# Altium PCB PCB.PcbDoc
Units mm, origin at the board's own origin, x right, y up, seen from the top; angles counter-clockwise.
Board outline 87.17 x 48.5 mm, 2 copper layers (Top Layer, Bottom Layer), stack 0.781 mm thick; 42 components, 27 nets, 111 pads, 5 vias.
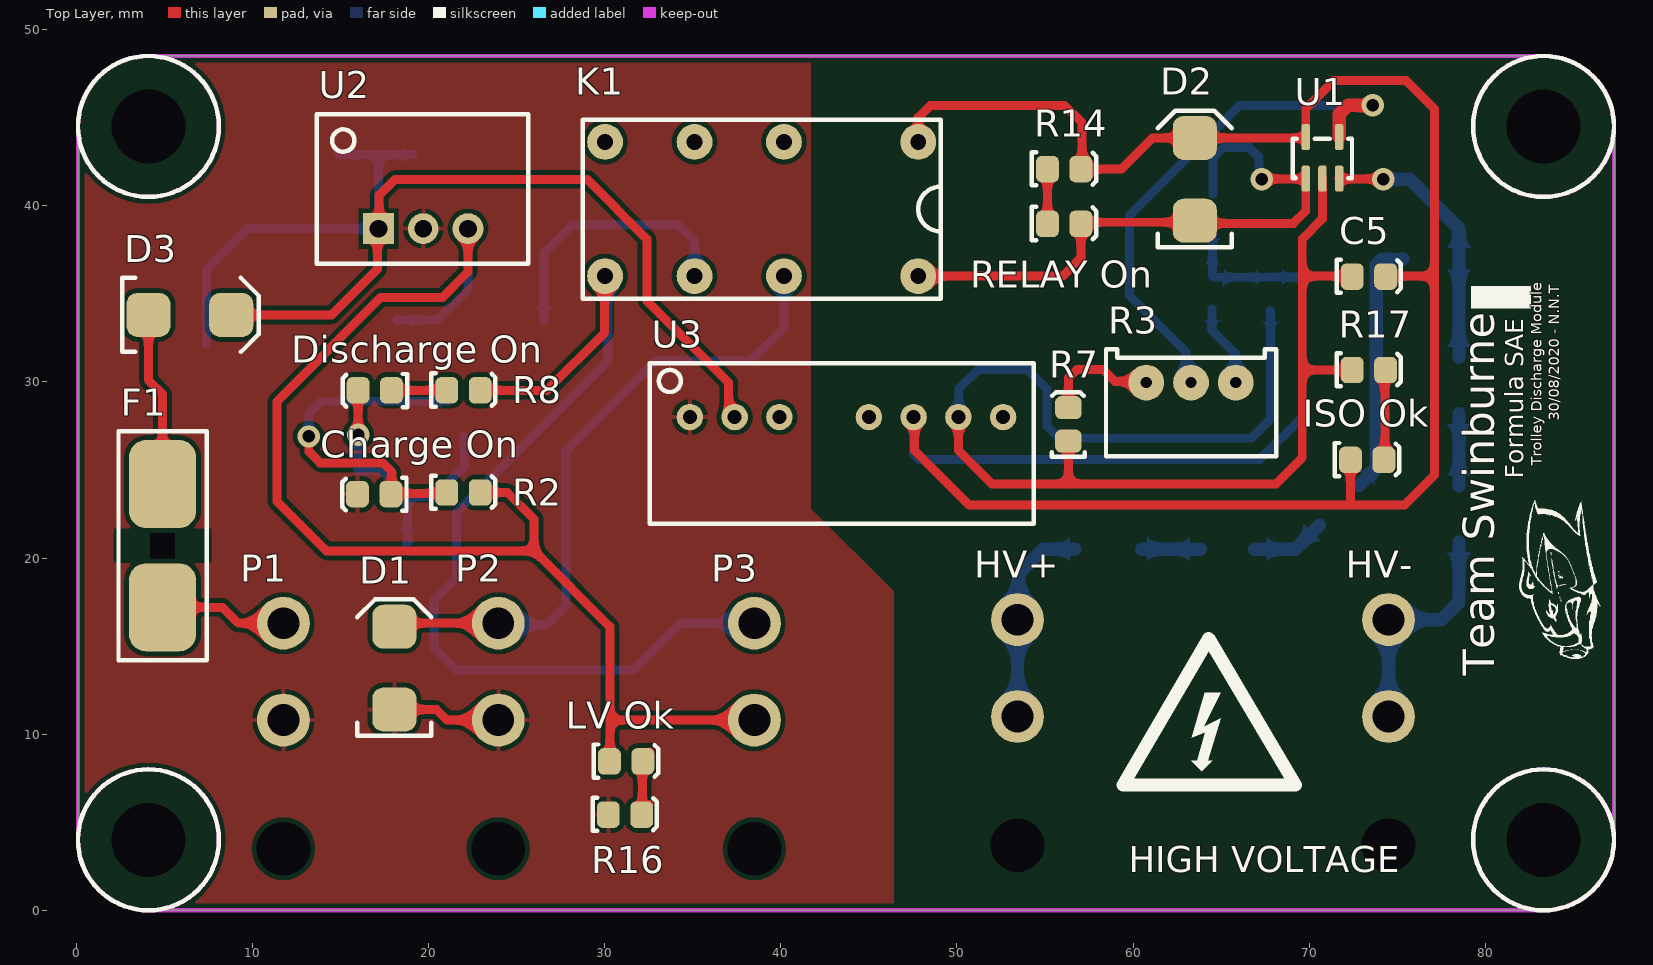
[diagram p0: Top Layer view]
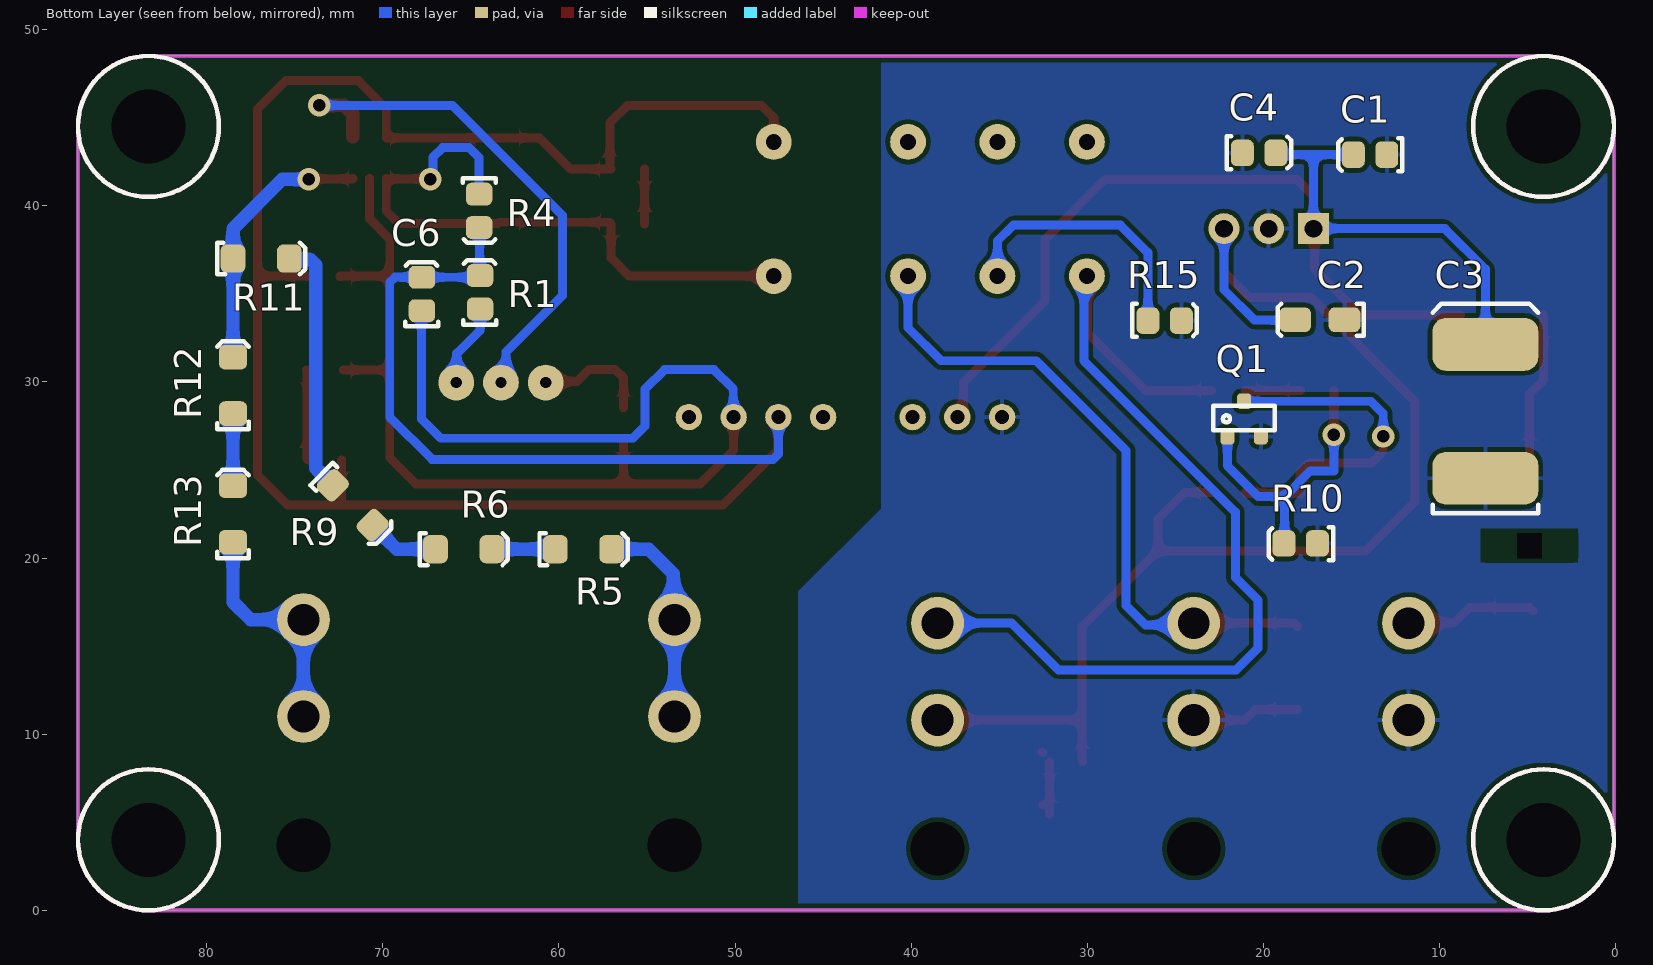
[diagram p1: Bottom Layer view, seen from below]
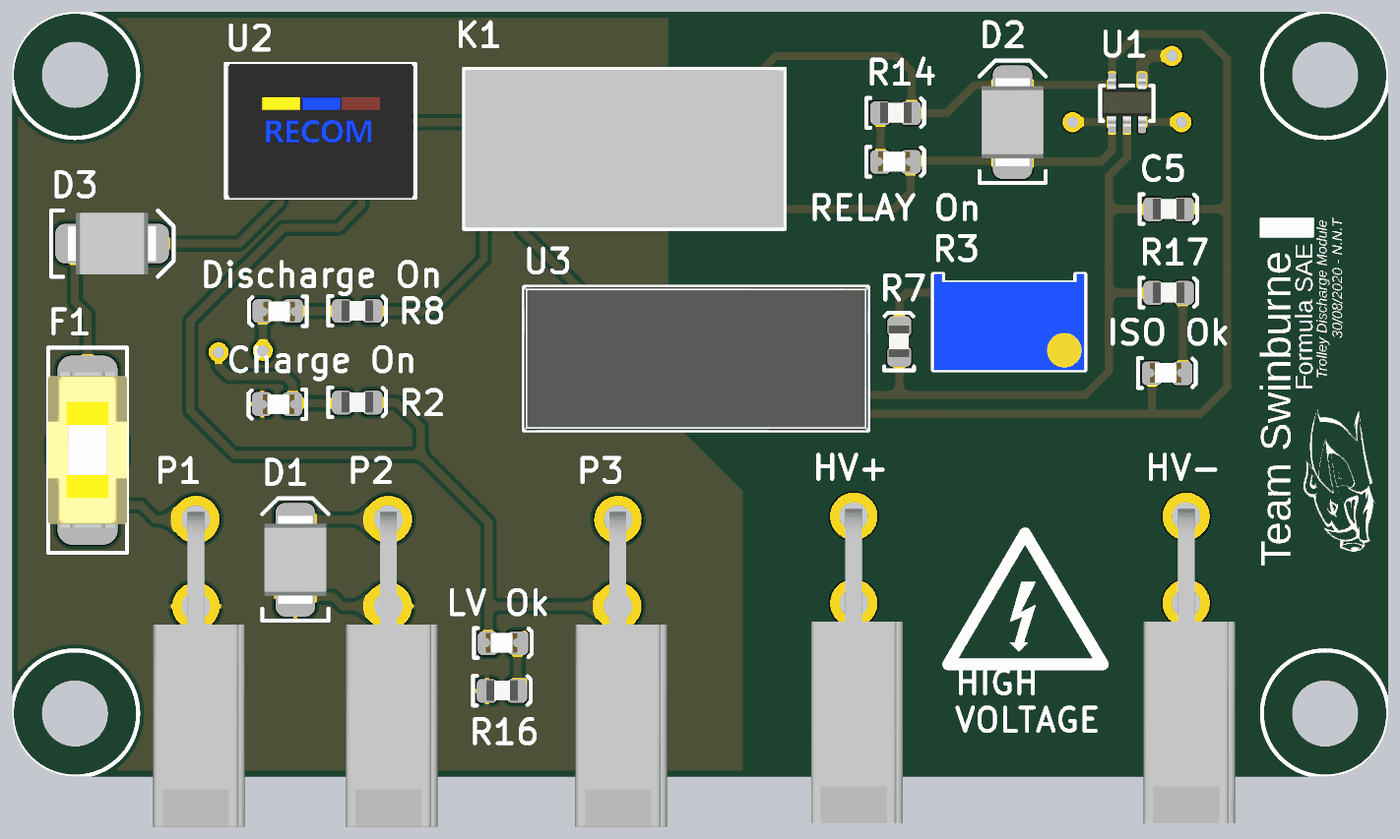
[diagram p2: 3D render of the assembled board from above, using the file's embedded part models]
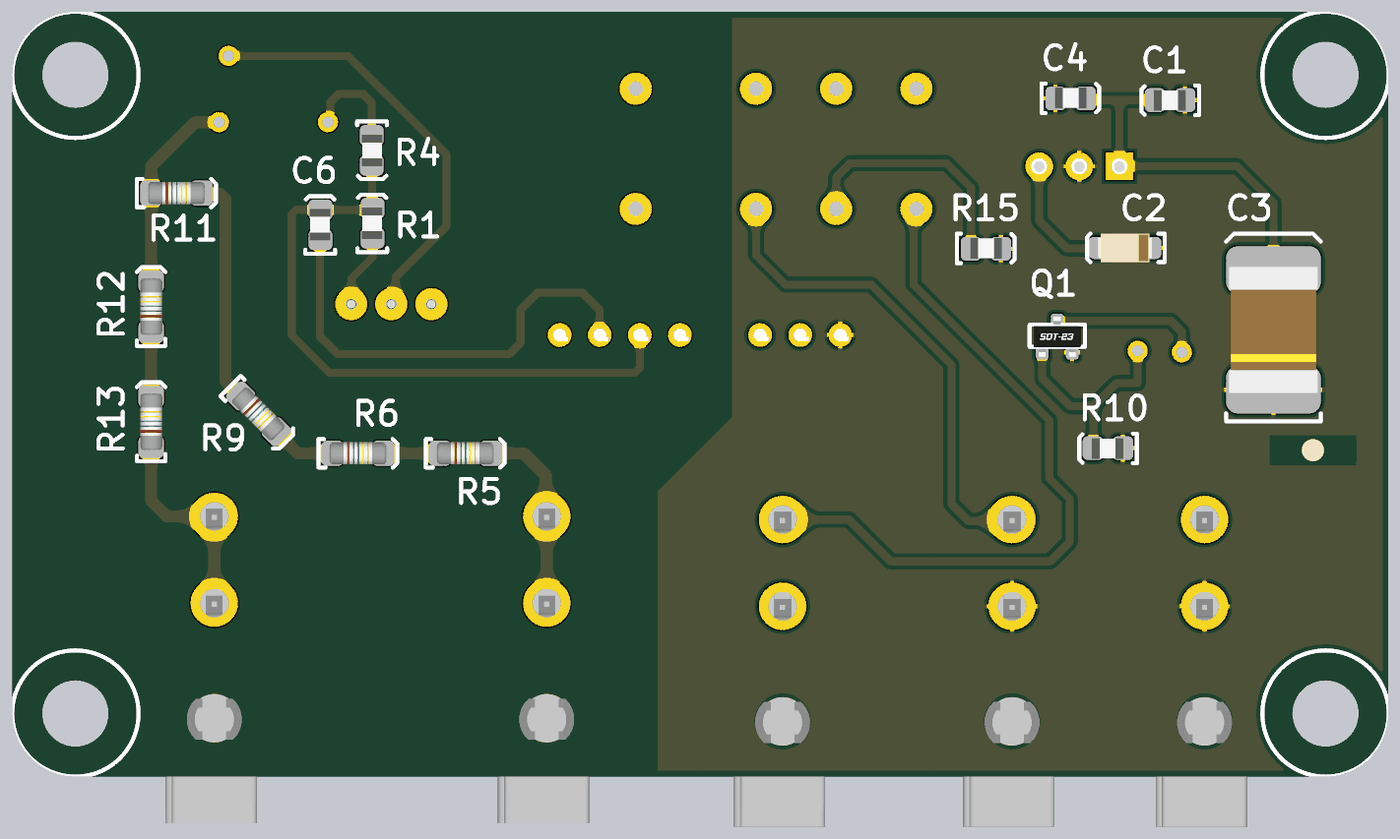
[diagram p3: 3D render of the assembled board from below, using the file's embedded part models]

## Layer stack, top to bottom
Top Solder: solder mask 0.0254, SM-001, Dk 4
Top Layer: signal copper 0.035
Dielectric x: core 0.7112, Core-039, Dk 4.8
Bottom Layer: signal copper 0.035
Bottom Solder: solder mask 0.0254, SM-001, Dk 4

## Board outline
4.1,0 83.3,0 ccw(c83.3,4) 87.3,4 87.3,44.5 ccw(c83.3,44.5) 83.3,48.5 4.1,48.5 ccw(c4.1,44.527) 0.127,44.527 0.127,3.973 ccw(c4.1,3.973)

## Design rules (kind name [scope] priority, off if disabled: settings)
Clearance [InNet('HV+')] p1: gap=3 ignorepadtopadclearanceinfootprint=FALSE except(1: Arc-SMDPad Track-SMDPad SMDPad-SMDPad)
Clearance Clearance_1 [All] p2: gap=0.254 ignorepadtopadclearanceinfootprint=FALSE
PolygonConnect [All] p1: connectstyle=Relief reliefconductorwidth=0.254 reliefentries=4 polygonreliefangle="90 Angle" airgapwidth=0.254
RoutingVias [All] p1: holewidth=0.711 width=1.27 viastyle="Through Hole" minholewidth=0.711 minwidth=1.27 maxholewidth=0.711 maxwidth=1.27
SolderMaskExpansion [All] p1: expansion=0.102 istentingtop=FALSE
Width [All] p1: maxlimit=1.16 minlimit=0.254 preferedwidth=0.508 minimp=50.000000 maximp=50.000000 favimp=50.000000
30 further rules are at their usual default settings.

## Classes and differential pairs
component class U_Switch: "Charge On" D2 "Discharge On" K1 P3 Q1 R1 R2 R3 R4 R6 R7 R8 R10 R11 R12 R13 R14 R15 "RELAY On" U1
component class U_Power: C1 C2 C3 C4 C5 C6 D3 F1 "ISO Ok" "LV Ok" R16 R17 U2 U3
component class "Top Level": D1 HV+ HV- P1 P2

## Components (designator, comment, footprint, x,y, rotation, side; value= is the part's Value field where it differs from the comment)
C1 "10uF" 0805 13.962,42.874 r0 bottom
C2 "22uF" 1206 18,33.525 r0 bottom
C3 "47uF" 2924 7.4,28.279 r90 bottom
C4 "100nF" 0805 20.238,43.026 r180 bottom
C5 "330nF" 0805 73.4,36 r0 top
C6 "10uF" 0805 67.8,35 r90 bottom
"Charge On" "Red" "0805 LED" 16.9,23.6 r180 top
D1 "SD560BTR" "SMB Diode" 18.062,11.65 r90 top
D2 "SD560BTR" "SMB Diode" 63.5,39.4 r90 top
D3 "SD560BTR" "SMB Diode" 4.35,33.8 r0 top
"Discharge On" "Red" "0805 LED" 16.935,29.496 r180 top
F1 "0154.750DR" "Omni BLOK 0154" 4.9,20.7 r270 top
HV+ "39300020" 39300020 53.438,11 r0 top
HV- "39300020" 39300020 74.5,11 r0 top
"ISO Ok" "Green" "0805 LED" 73.3,25.6 r0 top
K1 "V23105A5303A201" "TI 2-DIL" 38.91,39.81 r180 top
"LV Ok" "Green" "0805 LED" 31.228,8.484 r0 top (schematic designator D7)
P1 "39300020" 39300020 11.762,10.8 r0 top
P2 "39300020" 39300020 23.962,10.8 r0 top
P3 "39300020" 39300020 38.5,10.8 r0 top
Q1 "BC817-16LT1" "ON SOT-23 BJT" 21.1,27.9 r180 bottom
R1 "10k" 0805 64.5,35.1 r90 bottom
R2 "680R" 0805 21.997,23.746 r0 top
R3 "10K (Var)" "B 3296" 63.2,29.4 r180 top
R4 "4.7k" 0805 64.5,39.7 r270 bottom
R5 "330K" "VB 0204" 58.6,20.5 r180 bottom
R6 "330K" "VB 0204" 65.4,20.5 r180 bottom
R7 "6.8k" 0805 56.3,27.6 r90 top
R8 "680R" 0805 21.997,29.548 r0 top
R9 "330K" "VB 0204" 71.7,23 r225 bottom
R10 "10k" 0805 17.9,20.8 r0 bottom
R11 "330K" "VB 0204" 76.9,37 r180 bottom
R12 "10K" "VB 0204" 78.5,29.8 r90 bottom
R13 "10K" "VB 0204" 78.5,22.5 r90 bottom
R14 "1k" 0805 56.1,42.1 r0 top
R15 "4.7k" 0805 25.6,33.5 r180 bottom
R16 "1k" 0805 31.166,5.457 r0 top
R17 "1k" 0805 73.4,30.7 r0 top
"RELAY On" "Red" "0805 LED" 56.1,39 r0 top
U1 "TS391ILT" "ON SOT-23-5" 69.175,40.563 r0 top
U2 "R-78C12-1.0" "RECOM 3-SIP" 17.161,38.7 r0 top
U3 "TMR 3-1212WI" "TRECO 8-SIP" 32.55,21.95 r0 top

## Footprints (in the part's own frame and the unit in brackets; to place one, negate y for a bottom-side part, rotate by r counter-clockwise, add the part's x,y. Pads: shape width x height; smd on the part's side, far side on the other; paste and mask are expansions set on the pad)
0805 [mm]
  rrect50% 1.3x1.5 smd: 1(-0.962,-0.026) 2(0.938,-0.026)
  silkscreen extent -1.85,-0.95 1.8,0.93, body extent -1,-0.65 1,0.66, height 0.73
"0805 LED" [mm]
  rrect50% 1.3x1.5 smd: A(-0.962,-0.026) K(0.938,-0.026)
  silkscreen extent -1.85,-0.95 1.8,0.93, body extent -1.1,-0.62 0.9,0.63, height 1
1206 [mm]
  rrect50% 1.8x1.4 smd: 1(-2.6,0) 2(0.2,0)
  silkscreen extent -3.7,-0.9 1.2,0.9, body extent -2.9,-0.9 0.5,0.9, height 1.85
2924 [mm]
  rrect50% 3x6 smd: 1(-3.75,0) 2(3.85,0)
  silkscreen extent -5.75,-3 6.15,3, body extent -3.94,-2.81 4.04,2.81, height 1.14
39300020 [mm]
  round 3 hole 1.8: 1(0,0) 2(0,5.5)
  round 1.524 hole 3.05: ""(0,-7.3)
  body extent -2.7,-13.97 3.1,5.97, height 11.4
"B 3296" [mil]
  round 80 hole 25.2: 1(-103.39,-22) 2(-3.39,-22) 3(96.61,-22)
  silkscreen extent -193,-97 187,143, body extent -191,-97 184,143, height 455
"Omni BLOK 0154" [mm]
  rrect50% 5x3.81 smd: 1(3.5,0) 2(-3.5,0)
  rect 0x0 hole 1.4 square unplated: 3(0,0)
  silkscreen extent -6.5,-2.5 6.5,2.5, body extent -4.93,-2.52 4.9,2.51, height 3.81
"ON SOT-23 BJT" [mm] "NUP2105L"
  rrect50% 0.8x0.9 smd: B(-0.95,-1) C(0,1) E(0.95,-1)
  silkscreen extent -1.75,-0.65 1.75,0.75, body extent -1.5,-1.28 1.5,1.27, height 1
"ON SOT-23-5" [mil]
  rrect50% 19x58 smd: 1(24.61,38.39) 2(62.01,38.39) 3(99.41,38.39) 4(99.41,131.39) 5(24.61,131.39)
  silkscreen extent -5,39 128,128, body extent 2,27 122,145, height 57
"RECOM 3-SIP" [mm] "12 to 42 Vdc In, 9 Vdc Out"
  rect 1.75x1.75 hole 1: 1(0,0)
  round 1.75 hole 1: 2(2.54,0) 3(5.08,0)
  silkscreen extent -3.5,-2 8.5,6.5, body extent -3.26,-2.02 8.34,6.48, height 11.41
"SMB Diode" [mm]
  rrect50% 2.5x2.5 smd: A(-0.25,0) K(4.45,0)
  silkscreen extent -1.75,-2.1 6,2.1, body extent -0.69,-1.97 4.9,1.97, height 2.5
"TI 2-DIL" [mil]
  round 80 hole 35.43: 1(-350,-150) 4(-50,-150) 6(150,-150) 8(350,-150) 9(350,150) 11(150,150) 13(-50,150) 16(-350,150)
  silkscreen extent -400,-200 400,200, body extent -398,-197 398,197, height 450
"TRECO 8-SIP" [mm]
  round 1.5 hole 0.8: 1(2.29,6.05) 2(4.83,6.05) 3(7.37,6.05) 5(12.45,6.05) 6(14.99,6.05) 7(17.53,6.05) 8(20.07,6.05)
  silkscreen extent 0,0 21.8,9.1, body extent 0,0 21.8,9.1, height 11.2
"VB 0204" [mm]
  rrect50% 1.4x1.6 smd: 1(-1.6,0) 2(1.6,0)
  silkscreen extent -2.5,-0.9 2.5,0.9, body extent -1.8,-0.7 1.8,0.7, height 1.4

## Part data
C1 C6: library part GRM21BR6YA106KE43L, Digikey Part Number=490-10514-6-ND, Manufacturer=muRata, Rated Voltage=50V, Tolerance=10%, Material=X5R, Part Number=GRM21BR6YA106KE43L
C2: library part CC1206MKX5R7BB226, Digikey Part Number=311-1997-2-ND, Manufacturer=YAGEO, Rated Voltage=16V, Tolerance=20%, Material=Ceramic, Part Number=CC1206MKX5R7BB226
C3: library part TAJV476K035RNJ, Digikey Part Number=478-8934-1-ND, Manufacturer="AVX Corporation", Rated Voltage=35V, Tolerance=10%, Material=Tantalum, Part Number=TAJV476K035RNJ
C4: library part GCM21BR71H104KA37L, Digikey Part Number=490-6064-1-ND, Manufacturer=muRata, Rated Voltage=50V, Tolerance=±10%, Material=X7R, Part Number=GCM21BR71H104KA37L
C5: library part GCM219R71H334KA55D, Digikey Part Number=490-8045-1-ND, Manufacturer=muRata, Rated Voltage=50V, Tolerance=±10%, Material=X7R, Part Number=GCM219R71H334KA55D
"Charge On" "Discharge On" "RELAY On": library part SML-210LTT86, "Red LED Indication - Discrete 1.75V 0805 (2012 Metric)", Digikey Part Number=511-1286-1-ND, Manufacturer="ROHM Semiconductor", Colour=Red, Digikey Link=https://www.digikey.com/product-detail/en/rohm-semiconductor/SML-210LTT86/511-1286-1-ND/637099, Part Number=SML-210LTT86
D1 D2 D3: "1.2V_F 600V 5A SMB", Digikey Part Number=1655-1530-2-ND, Manufacturer="SMC Diode Solutions", Digikey Link=https://www.digikey.com/product-detail/en/smc-diode-solutions/SD560BTR/1655-1530-2-ND/6022620, Part Number=SD560BTR
F1: "FUSE BOARD MNT 750MA 125VAC/VDC", Digikey Part Number=F1221CT-ND, Manufacturer="LittelFuse Inc", Digikey Link=https://www.digikey.com/product-detail/en/littelfuse-inc/0154.750DR/F1221CT-ND/183370, Part Number=0154.750DR
HV+ HV- P1 P2 P3: Digikey Part Number=WM21351-ND, Angle=90, Contact=Tin, Flange=No, Part Number=39300020, Pitch=4.2mm, Positions=2, Row Spacing=5.5mm
"ISO Ok" "LV Ok": library part SML-210FTT86, "Green LED Indication - Discrete 1.75V 0805 (2012 Metric)", Digikey Part Number=511-1285-1-ND, Manufacturer="ROHM Semiconductor", Colour=Green, Digikey Link=https://www.digikey.com/product-detail/en/rohm-semiconductor/SML-210FTT86/511-1285-1-ND/637098, Part Number=SML-210FTT86
K1: "RELAY TELECOM DPDT 3A 12V", Digikey Part Number=PB387-ND, Manufacturer="TE Connectivity", Digikey Link=https://www.digikey.com/product-detail/en/te-connectivity-potter-brumfield-relays/V23105A5303A201/PB387-ND/291023, Part Number=V23105A5303A201
Q1: "300mW  BJT NPN Transistor", Digikey Part Number=BC817-16LT1OSTR-ND, Manufacturer="ON Semiconductor", Digikey Link=https://www.digikey.com.au/product-detail/en/on-semiconductor/BC817-16LT1/BC817-16LT1OSTR-ND/606178, Part Number=BC817-16LT1
R1 R10: library part RC0805FR0710KL, Digikey Part Number=311-10.0KCRCT-ND, Manufacturer=YAGEO, Rated Voltage=0.125W, Tolerance=0.01, Material=FR-07, Part Number=RC0805FR0710KL
R2 R8: library part RC0805FR07680RL, Digikey Part Number=311-680CRCT-ND, Manufacturer=YAGEO, Rated Voltage=0.125W, Tolerance=0.01, Material=FR-07, Part Number=RC0805FR07680RL
R3: library part 3296W-1-103LF, Digikey Part Number=3296W-103LF-ND, Manufacturer="Bournes Inc", Rated Voltage=0.5W, Tolerance=0.1, Part Number=3296W-1-103LF
R4 R15: library part RC0805FR074K7L, Digikey Part Number=311-4.70KCRCT-ND, Manufacturer=YAGEO, Rated Voltage=0.125W, Tolerance=0.01, Material=FR-07, Part Number=RC0805FR074K7L
R5 R6 R9 R11: library part MMA02040C3303FB300, Digikey Part Number=MMA-330KACT-ND, Manufacturer="Vishay Beyschlag", Rated Voltage=0.4W, Tolerance=0.01, Part Number=MMA02040C3303FB300
R7: library part RC0805FR076K8L, Digikey Part Number=311-6.80KCRCT-ND, Manufacturer=YAGEO, Rated Voltage=0.125W, Tolerance=0.01, Material=FR-07, Part Number=RC0805FR076K8L
R12 R13: library part MMA02040C1002FB300, Digikey Part Number=MMA-10KACT-ND, Manufacturer="Vishay Beyschlag", Rated Voltage=0.4W, Tolerance=0.01, Part Number=MMA02040C1002FB300
R14 R16 R17: library part RC0805FR071KL, Digikey Part Number=311-1.00KCRCT-ND, Manufacturer=YAGEO, Rated Voltage=0.125W, Tolerance=0.01, Material=FR-07, Part Number=RC0805FR071KL
U1: "IC COMP LO PWR SGL V SOT 23-5L", Digikey Part Number=497-2275-2-ND, Manufacturer=STMicroelectronics, Digikey Link=https://www.digikey.com/product-detail/en/stmicroelectronics/TS391ILT/497-2275-2-ND/599407, Part Number=TS391ILT
U2: "3PIN DC DC CONVERTER 12V 12W", Digikey Part Number=945-1392-5-ND, Manufacturer=Recom, Digikey Link=https://www.digikey.com/products/en/power-supplies-board-mount/dc-dc-converters/922?k=R-78C&k=&pkeyword=R-78C&sv=0&pv1525=44&sf=0&FV=ffe0039a&quantity=&ColumnSort=0&page=1&pageSize=25, Isolation=Non-Isolated, Part Number=R-78C12-1.0
U3: "DC DC CONVERTER 12V 3W", Digikey Part Number=1951-2367-ND, Manufacturer="Traco Power", Digikey Link=https://www.digikey.com.au/product-detail/en/traco-power/TMR-3-1212WI/1951-2367-ND/9383402, Isolation=Isolated, Part Number="TMR 3-1212WI"

## Free pads (board coordinates)
  round 0 hole 4.2 unplated: 2(4.1,4) 2(4.1,44.5) 2(83.3,4) 2(83.3,44.5)

## Via types
v1: diameter 1.27, hole 0.711, Top Layer to Bottom Layer, 5 vias

## Nets (pads, with @x,y where several pads share a name; then routed paths per layer and width w, separated by ;. In a path a pad name is that pad's centre, name@x,y a point inside that pad or via, vN(x,y) a via of type N, cw(c..) or ccw(c..) an arc to the next point about the centre after c; other vN are vias at no path point)
0V: "Charge On.K" C1.1 C2.1 C3.1 C4.1 D1.A P1.1 P2.1 Q1.E R10.1 R15.2 R16.1 U2.2 U3.1 | length 6.1
  Top Layer w0.508: D1.A 20.451,11.4 21.051,10.8 P2.1
"0V (ISO)": C5.1 C6.1 R7.1 R17.1 U1.2 U3.7 | length 76.3
  Top Layer w0.508: U3.7 50.08,26.12 52,24.2 56.326,24.2 ; R7.1 56.326,24.2 ; U1.2 70.75,39.25 69.6,38.1 69.6,36 ; R17.1@72.238,30.674 69.6,30.674 ; C5.1 72.412,36 69.6,36 ; 56.326,24.2 68.1,24.2 69.6,25.7 69.6,30.674 ; 69.6,30.674 69.6,36
  Bottom Layer w0.508: U3.7 50.1,28.02 50.1,29.6 51.2,30.7 54,30.7 55.1,29.6 55.1,27.5 55.8,26.8 66.7,26.8 67.8,27.9 67.8,34.012 C6.1
12V: "LV Ok.A" C2.2 P3.1 R2.2 U2.3 | length 73.5
  Top Layer w0.508: U2.3 22.241,36.241 20.8,34.8 17.3,34.8 11.4,28.9 11.4,23.2 14.2,20.4 26,20.4 ; R2.2 24.48,23.72 26,22.2 26,20.4 ; 30.266,8.457 30.3,8.491 30.3,10.8 ; P3.1@38.4,10.7 P3.1 ; P3.1@38.4,10.8 30.3,10.8 ; 26,20.4 30.3,16.1 30.3,10.8
  Bottom Layer w0.508: C2.2 18.225,33.5 20.5,33.5 22.241,35.241 U2.3
"12V (ISO)": "ISO Ok.A" C5.2 C6.2 D2.K K1.1 R1.2 R4.2 R14.2 U1.5 U3.6 | length 138.4
  Top Layer w0.508: U3.6 47.6,27.94 47.6,26.1 50.7,23 72.3,23 ; K1.1 47.8,45 48.5,45.7 56.1,45.7 57.1,44.7 57.1,42.136 R14.2 59.326,42.074 61.102,43.85 D2.K 69.787,43.85 69.8,43.863 U1.5 69.8,45.517 71.384,47.1 75.5,47.1 77.1,45.5 77.1,36 ; 72.338,25.574 72.338,23.038 72.3,23 ; C5.2 74.364,36 77.1,36 ; 72.3,23 75.4,23 77.1,24.7 77.1,36
  Bottom Layer w0.508: U3.6 47.54,25.898 47.838,25.6 67.2,25.6 69.6,28 69.6,35.652 69.302,35.95 67.786,35.95 C6.2 64.574,35.938 R1.2 64.5,36.064 64.5,38.736 R4.2
HV+: HV+.1 HV+.2 R5.2 | length 11.9
  Bottom Layer w0.762: HV+.1 HV+.2 53.5,16.562 53.5,19.1 54.9,20.5 R5.2@56.7,20.5
HV-: HV-.1 HV-.2 R13.1 | length 13.3
  Bottom Layer w0.762: HV-.1 HV-.2 77.5,16.5 78.5,17.5 R13.1
LV: C1.2 C3.2 C4.2 D3.K U2.1 U3.2 | length 66.3
  Top Layer w0.508: D3.K 14.5,33.8 17.1,36.4 17.1,38.639 U2.1 17.2,38.739 17.2,40.6 18.1,41.5 29,41.5 32.4,38.1 32.4,34.6 37.04,29.96 U3.2@37.04,28
  Bottom Layer w0.508: C3.2 7.4,36.407 9.699,38.706 17.156,38.706 U2.1 17.161,42.9 ; C1.2 17.161,42.9 ; C4.2@19.1,42.9 17.161,42.9 ; U3.2@37.19,27.81 U3.2
"NetCharge On_A": "Charge On.A" Q1.C R2.1 | length 20
  Top Layer w0.508: v1(13.2,26.9) 13.2,26.049 13.849,25.4 17.4,25.4 17.9,24.9 17.9,23.664 ; 17.862,23.626 17.9,23.664 ; R2.1 20.988,23.673 17.909,23.673 17.9,23.664
  Bottom Layer w0.508: v1(13.2,26.9) 13.2,28.2 13.9,28.9 Q1.C
NetD1_K: D1.K K1.13 P2.2 | length 37.6
  Top Layer w0.508: D1.K 18.262,16.3 P2.2
  Bottom Layer w0.508: P2.2 24.062,16.2 26.7,16.2 27.8,17.3 27.8,26.1 32.9,31.2 38.3,31.2 40.18,33.08 K1.13 K1.13@39.9,36
NetD2_A: "RELAY On.K" D2.A K1.16 R4.1 U1.1 | length 35.5
  Top Layer w0.508: K1.16 56,36 57.038,37.038 57.038,38.974 57.126,39.062 63.412,39.062 63.474,39 69.1,39 69.8,39.7 U1.1@69.8,41.532 ; v1(67.3,41.5) 67.319,41.519 69.787,41.519 U1.1@69.8,41.532 ; U1.1 U1.1@69.8,41.532
  Bottom Layer w0.508: R4.1 64.526,42.726 65.1,43.3 66.6,43.3 67.154,42.746 67.154,41.646 v1(67.3,41.5)
NetD3_A: D3.A F1.2 | length 9.9
  Top Layer w0.508: D3.A 4.1,30.1 4.9,29.3 F1.2
"NetDischarge On_A": "Discharge On.A" R8.1 | length 3.1
  Top Layer w0.508: 17.897,29.522 R8.1
"NetDischarge On_K": "Discharge On.K" Q1.B R10.2 | length 16.3
  Top Layer w0.508: 15.997,29.522 15.999,29.521 v1(16,27) v1(16,27)
  Bottom Layer w0.508: v1(16,27) 16,24.95 17.334,24.95 18.8,23.484 ; R10.2@18.738,20.826 R10.2@18.9,20.988 ; R10.2@18.8,20.988 18.8,23.484 ; Q1.B 22.05,25.25 20.284,23.484 18.8,23.484
NetF1_1: F1.1 P1.2 | length 7.5
  Top Layer w0.508: F1.1@4.7,17 F1.1 8.3,17.2 9.2,16.3 P1.2
"NetISO Ok_K": "ISO Ok.K" R17.2 | length 5.1
  Top Layer w0.508: 74.238,25.574 74.288,25.624 74.288,30.624 R17.2
NetK1_9: K1.9 P3.2 R8.2 | length 56.7
  Top Layer w0.508: R8.2 26.722,29.522 30,32.8 30,35.98 K1.9
  Bottom Layer w0.508: K1.9 30.2,35.82 30.2,31.2 21.6,22.6 21.6,18.9 20.3,17.6 20.3,14.9 21.55,13.65 31.65,13.65 34.3,16.3 P3.2
NetK1_11: K1.11 R15.1 | length 15.4
  Bottom Layer w0.508: R15.1 26.562,37.338 28.124,38.9 34.2,38.9 35.1,38 K1.11
"NetLV Ok_K": "LV Ok.K" R16.2 | length 3.1
  Top Layer w0.508: R16.2@32.135,5.462 32.135,8.427 ; R16.2@32.5,5.974 R16.2@32.531,6.005 ; 32.531,8.969 32.562,9
NetR1_1: R1.1 R3.1 | length 4.7
  Bottom Layer w0.508: R1.1 64.474,32.926 65.8,31.6 65.8,29.985 R3.1
NetR3_2: R3.2 U1.4 | length 30.7
  Top Layer w0.762: U1.4 71.713,43.913 71.713,45.213 72.2,45.7 v1(73.6,45.7)
  Bottom Layer w0.508: R3.2 62.995,30.25 62.995,31.705 59.8,34.9 59.8,39.454 66.046,45.7 v1(73.6,45.7)
NetR3_3: R3.3 R7.2 | length 6.6
  Top Layer w0.508: R7.2 56.326,30.226 56.8,30.7 58.3,30.7 58.968,30.032 60.673,30.032 R3.3
NetR5_1: R5.1 R6.2 | length 3.3
  Bottom Layer w0.762: R5.1@60.5,20.5 R6.2
NetR6_1: R6.1 R9.2 | length 4.2
  Bottom Layer w0.762: R6.1@66.9,20.5 69.2,20.5 R9.2
NetR9_1: R9.1 R11.2 | length 14.6
  Bottom Layer w0.762: R9.1 73.8,25.1 73.8,36.64 74.098,36.938 75.238,36.938 R11.2
NetR11_1: R11.1 R12.2 U1.3 | length 15.3
  Top Layer w0.508: U1.3 71.7,41.532 71.713,41.519 74.181,41.519 v1(74.2,41.5)
  Bottom Layer w0.762: v1(74.2,41.5) 75.7,41.5 78.5,38.7 R11.1 R12.2
NetR12_1: R12.1 R13.2 | length 4.1
  Bottom Layer w0.762: R13.2 R12.1
NetR14_1: "RELAY On.A" R14.1 | length 3.1
  Top Layer w0.508: 55.138,38.974 R14.1
pads on no net: F1.3 HV+. HV-. K1.4 K1.6 K1.8 P1. P2. P3. U3.3 U3.5 U3.8

## Polygon pours and split planes (outlines as drawn)
0V on Top Layer "0V_L01_P000" (solid, remove dead copper, pour order 0): 0,48.5 0,0 46.4,0 46.4,18.1 41.7,22.8 41.7,48.5
0V on Bottom Layer "0V_L02_P001" (solid, remove dead copper, pour order 1): 0,48.7 0,0 46.3,0 46.4,0.1 46.4,18.1 41.7,22.8 41.7,48.7

## Keep-outs
Keep-Out Layer:
  circle w0.254: c83.3,44.5 r4
  circle w0.254: c83.3,4 r4
  circle w0.254: c4.1,4 r4
  circle w0.254: c4.1,44.5 r4
  lines w0.254: 0.1,3.9 0.1,44.6 ; 4,0 83.3,0 ; 4.1,48.5 83.2,48.5 ; 87.3,4 87.3,44.7

## Silkscreen, mask and mechanical layers (free items; w line width, h text height)
Top Overlay:
  drawing of 28 lines, arcs and shapes, not listed
  text "30/08/2020 - N.N.T" at 84.378,27.79 h1.02 r90
  text "Trolley Discharge Module" at 83.4,25.238 h1.02 r90
  text "Formula SAE" at 82.5,24.5 h1.78 r90
  text "Team Swinburne" at 81.103,13.324 h3.05 r90
  text "HIGH VOLTAGE" at 59.759,2.151 h1.47
Bottom Overlay:
  circle w0.254: c4.1,4 r4
  circle w0.254: c4.1,44.5 r4
  circle w0.254: c83.3,4 r4
  circle w0.254: c83.3,44.5 r4